# Altium PCB PCB1.pcbdoc
Units mil, origin at the board's own origin, x right, y up, seen from the top; angles counter-clockwise.
Board outline 3247.81 x 2766.73 mil, 2 copper layers (Top Layer, Bottom Layer), stack 2.756 mil thick; 92 components, 72 nets, 327 pads, 99 vias.
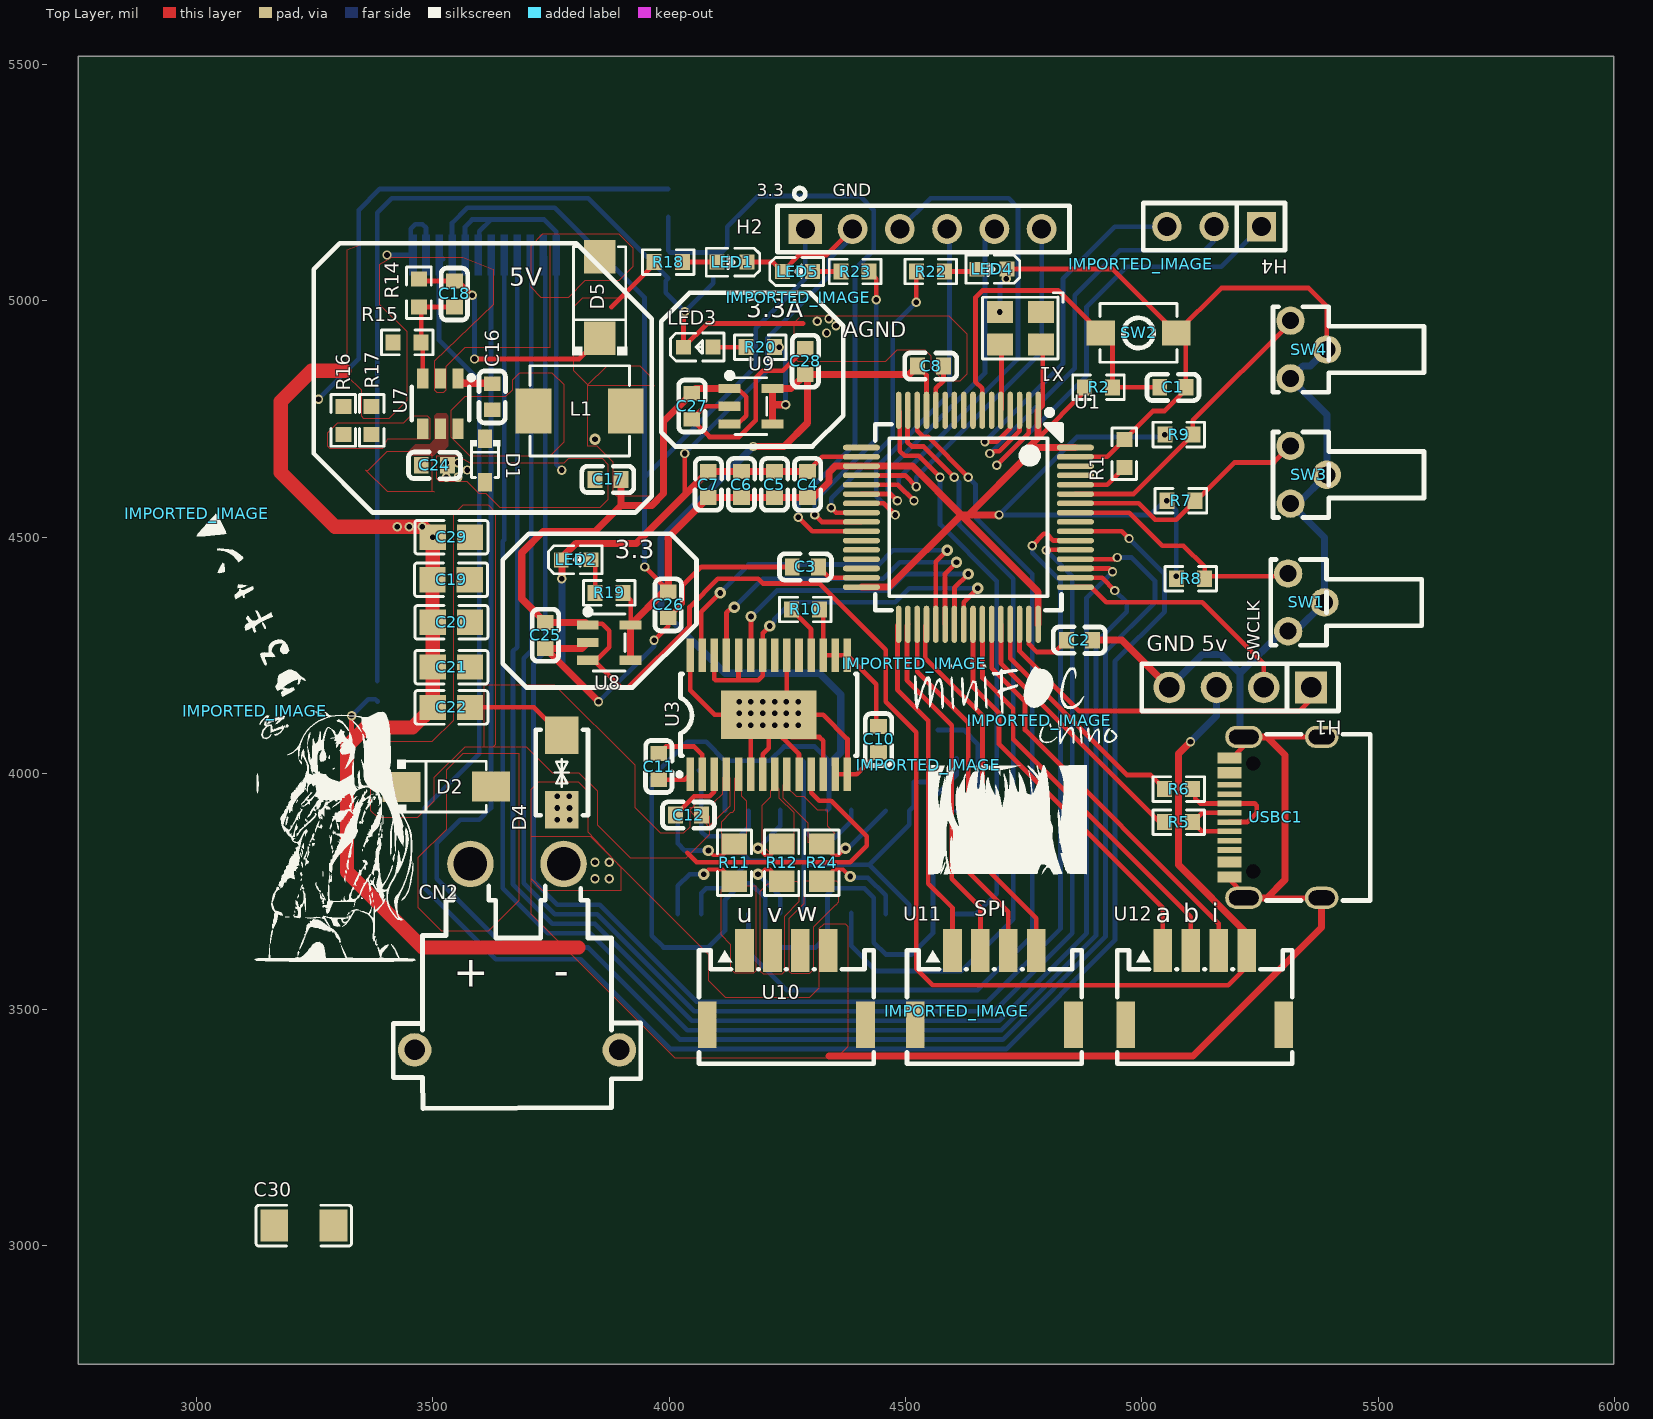
[diagram p0: Top Layer view]
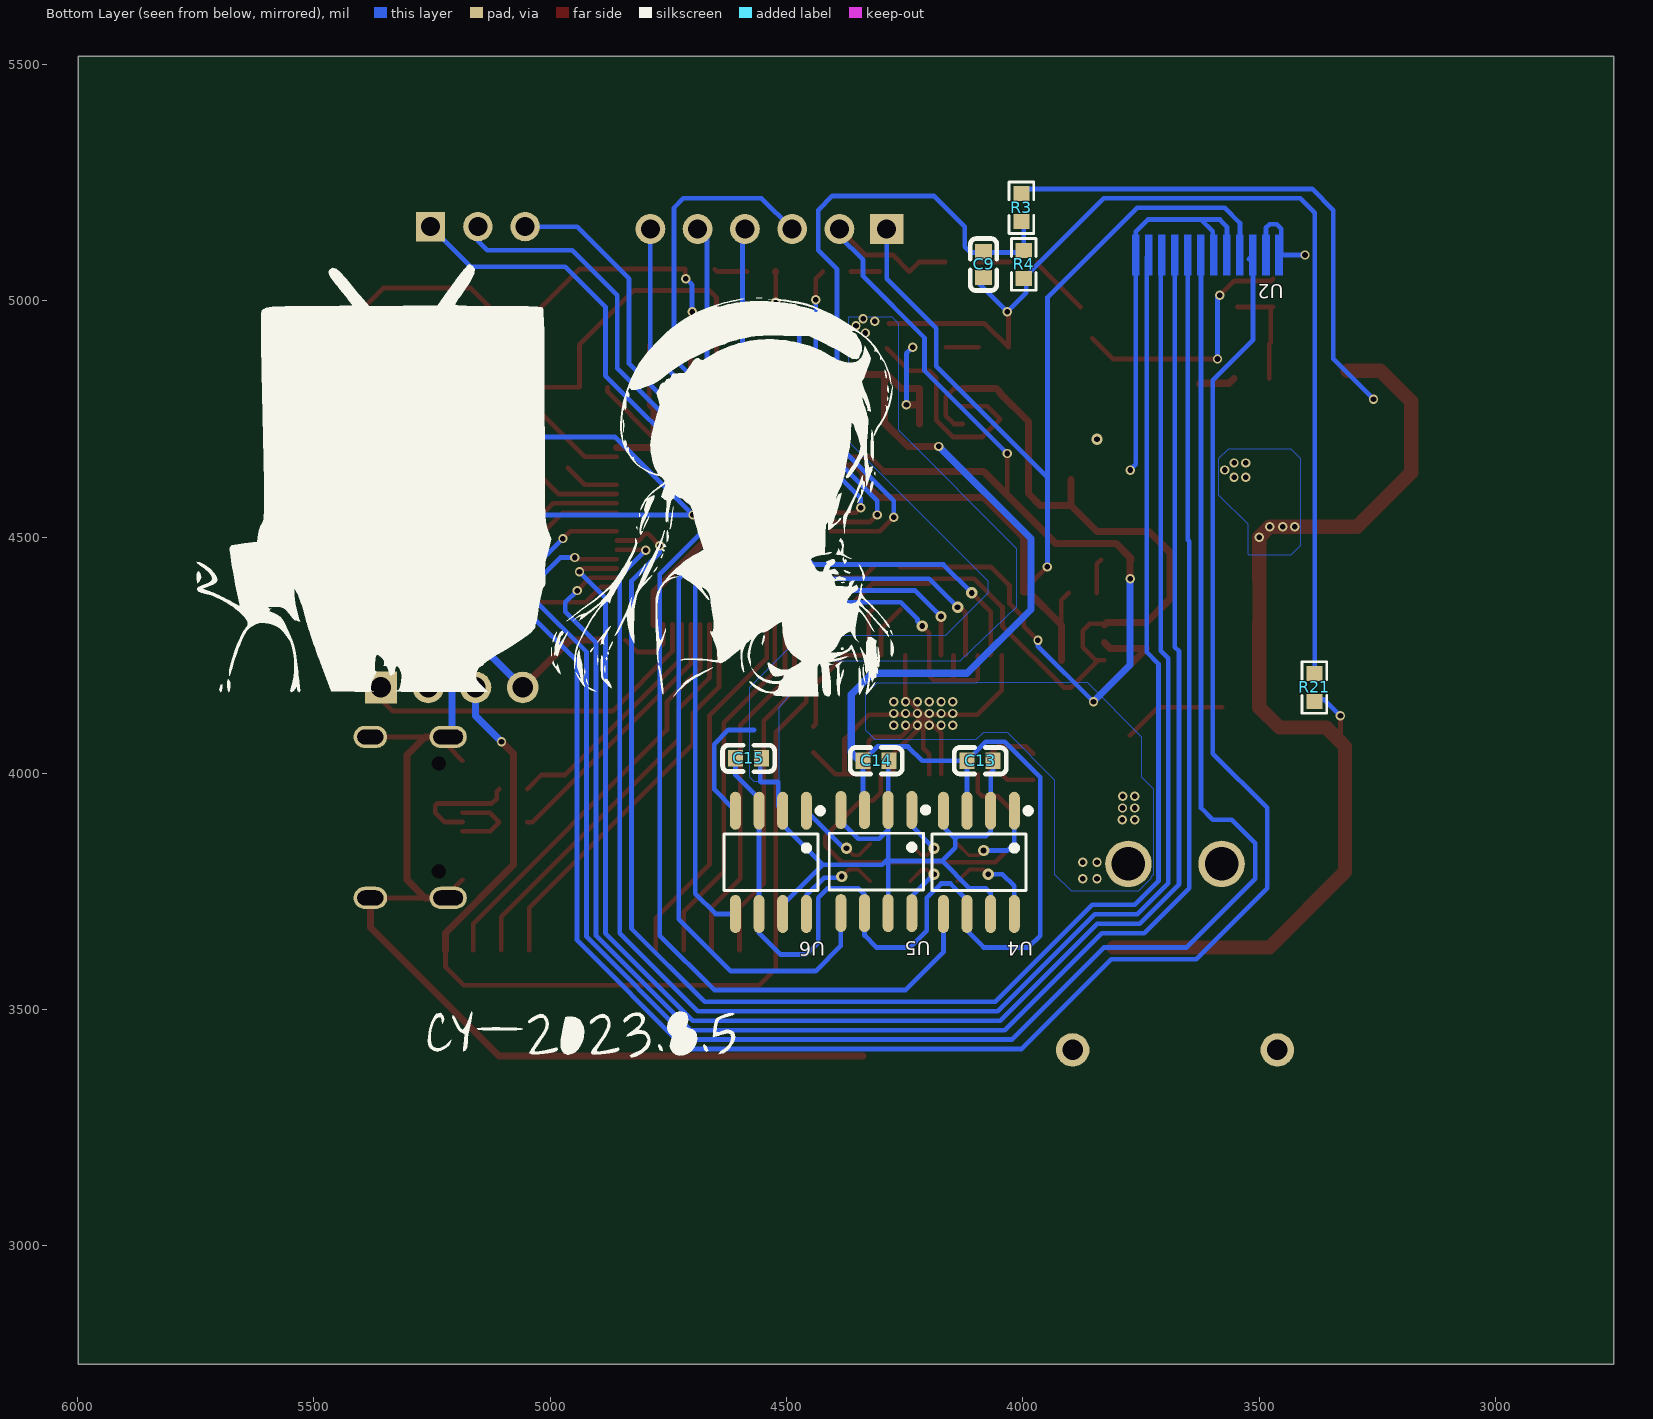
[diagram p1: Bottom Layer view, seen from below]

## Layer stack, top to bottom
Top Layer: signal copper 1.378
Bottom Layer: signal copper 1.378

## Board outline
5997.81,2750 2750,2750 2750,5516.73 5997.81,5516.73

## Components (designator, comment, footprint, x,y, rotation, side; value= is the part's Value field where it differs from the comment)
C1 "CAP_0603" C0603 5065.37,4816.73 r180 top
C2 "CAP_0603" C0603 4867.81,4281.73 r0 top
C3 "CAP_0603" C0603 4287.81,4436.73 r180 top
C4 "CAP_0603" C0603 4292.6,4611.12 r270 top
C5 "CAP_0603" C0603 4222.6,4611.12 r270 top
C6 "CAP_0603" C0603 4152.6,4611.12 r270 top
C7 "CAP_0603" C0603 4082.6,4611.12 r270 top
C8 "CAP_0603" C0603 4552.81,4861.73 r180 top
C9 "CAP_0603" C0603 4082.81,5076.73 r90 bottom
C10 "CAP_0603" C0603 4442.81,4071.73 r90 top
C11 "CAP_0603" C0603 3977.81,4014.17 r270 top
C12 "CAP_0603" C0603 4040.37,3911.73 r180 top
C13 "CAP_0603" C0603 4090.25,4026.73 r0 bottom
C14 "CAP_0603" C0603 4310.25,4026.73 r0 bottom
C15 "CAP_0603" C0603 4580.25,4031.73 r0 bottom
C16 "CAP_0603" C0603 3625.37,4796.73 r90 top
C17 "CAP_0603" C0603 3870.37,4621.73 r0 top
C18 "CAP_0603" C0603 3545.37,5014.29 r90 top
C19 "CAP_0805" C0805 3538.43,4409.62 r0 top
C20 "CAP_0805" C0805 3539.06,4319.62 r0 top
C21 "CAP_0805" C0805 3539.06,4224.62 r0 top
C22 "CAP_0805" C0805 3539.06,4139.62 r0 top
C24 "CAP_0603" C0603 3502.81,4651.73 r180 top
C25 "CAP_0603" C0603 3737.81,4291.73 r270 top
C26 "CAP_0603" C0603 3997.81,4356.73 r90 top
C27 "CAP_0603" C0603 4047.81,4776.73 r270 top
C28 "CAP_0603" C0603 4287.81,4871.73 r270 top
C29 "CAP_0805" C0805 3539.06,4499.62 r0 top
C30 "CAP_1206" C1206 3226.74,3043.02 r0 top
CN2 "XT30PW-M" CONN-TH_XT30PW-M 3677.81,3611.73 r0 top
D1 "1N5819WS_C191023" SOD-323_L1.8-W1.3-LS2.5-RD 3610.37,4661.73 r270 top
D2 "SS54_C727065" SMA_L4.3-W2.6-LS5.0-RD 3527.81,3971.73 r0 top
D4 "SMAJ15CA_C726784" SMA_L4.3-W2.5-LS5.0-BI 3772.81,4001.73 r90 top
D5 "SMAJ5.0A_C113952" SMA_L4.4-W2.6-LS5.0-RD 3852.81,5006.73 r90 top
H1 "HDR-F_2.54_1x4P" HDR-TH_4P-P2.54-V-F 5207.81,4181.73 r180 top
H2 "HDR-F_2.54_1x6P" HDR-TH_6P-P2.54-V-F 4537.81,5151.73 r0 top
H4 "HDR-F_2.54_1x3P" HDR-TH_3P-P2.54-V-F 5152.81,5156.73 r180 top
IMPORTED_IMAGE "IMPORTED_IMAGE" IMPORTED_IMAGE 4517.8,4231.73 r0 top
IMPORTED_IMAGE "IMPORTED_IMAGE" IMPORTED_IMAGE 4782.81,4111.73 r0 top
IMPORTED_IMAGE "IMPORTED_IMAGE" IMPORTED_IMAGE 3000,4549.23 r0 top
IMPORTED_IMAGE "IMPORTED_IMAGE" IMPORTED_IMAGE 4547.81,4016.99 r0 top
IMPORTED_IMAGE "IMPORTED_IMAGE" IMPORTED_IMAGE 3122.81,4131.73 r0 top
IMPORTED_IMAGE "IMPORTED_IMAGE" IMPORTED_IMAGE 4272.81,5006.73 r0 top
IMPORTED_IMAGE "IMPORTED_IMAGE" IMPORTED_IMAGE 4997.81,5076.73 r0 top
IMPORTED_IMAGE "IMPORTED_IMAGE" IMPORTED_IMAGE 4608.3,3496.73 r0 top
L1 "GPSR0520-4R7M" IND-SMD_L5.2-W4.7_GPSR0520 3810.37,4766.73 r180 top
LED1 "LTST-C191KRKT" LED0603-RD 4132.81,5081.73 r180 top
LED2 "LTST-C191KRKT" LED0603-RD 3802.81,4451.73 r0 top
LED3 "LTST-C191KRKT" LED0603-RD 4061.34,4901.6 r0 top
LED4 "19-217/GHC-YR1S2/3T" LED0603-RD 4682.81,5066.73 r180 top
LED5 "19-217/GHC-YR1S2/3T" LED0603-RD 4271.34,5061.6 r0 top
R1 "Res_0603" R0603 4962.81,4676.39 r90 top
R2 "Res_0603" R0603 4908.15,4816.73 r180 top
R3 "Res_0603" R0603 4002.81,5196.73 r90 bottom
R4 "Res_0603" R0603 3997.81,5076.73 r90 bottom
R5 "Res_0603" R0603 5077.81,3896.73 r180 top
R6 "Res_0603" R0603 5077.81,3966.73 r180 top
R7 "Res_0603" R0603 5082.47,4576.73 r180 top
R8 "Res_0603" R0603 5103.15,4411.73 r180 top
R9 "Res_0603" R0603 5078.15,4716.73 r180 top
R10 "Res_0603" R0603 4287.81,4346.73 r0 top
R11 "Res_0805" R0805 4137.81,3811.1 r270 top
R12 "Res_0805" R0805 4237.81,3811.1 r270 top
R14 "Res_0603" R0603 3470.37,5016.73 r90 top
R15 "Res_0603" R0603 3445.37,4911.73 r0 top
R16 "Res_0603" R0603 3310.37,4746.73 r90 top
R17 "Res_0603" R0603 3370.37,4746.73 r90 top
R18 "Res_0603" R0603 3997.81,5081.73 r180 top
R19 "Res_0603" R0603 3872.81,4381.73 r0 top
R20 "Res_0603" R0603 4192.47,4901.73 r0 top
R21 "Res_0603" R0603 3382.81,4181.73 r270 bottom
R22 "Res_0603" R0603 4553.15,5061.73 r0 top
R23 "Res_0603" R0603 4393.15,5061.73 r180 top
R24 "Res_0805" R0805 4322.81,3811.1 r270 top
SW1 "TC-1150DL-8.0H-250" SW-SMD_DEALON_TC-1150DL-8.0H-160 5347.81,4361.73 r90 top
SW2 "KEY-3*4*2" SW-SMD_L4.0-W2.9-LS5.0 4992.81,4931.73 r180 top
SW3 "TC-1150DL-8.0H-250" SW-SMD_DEALON_TC-1150DL-8.0H-160 5352.81,4631.73 r90 top
SW4 "TC-1150DL-8.0H-250" SW-SMD_DEALON_TC-1150DL-8.0H-160 5352.81,4896.73 r90 top
U1 "STM32F405RGT6" LQFP-64_L10.0-W10.0-P0.50-LS12.0-BL 4632.81,4541.73 r180 top
U2 "IPS-12P" IPS 3607.81,5096.73 r0 bottom
U3 "DRV8313PWP" TSSOP-28_L9.7-W4.4-P0.65-LS6.4-TL-EP-2 4210.57,4123.81 r90 top
U4 "INA240A1D" SOIC-8_L4.9-W3.9-P1.27-LS6.0-BL 4092.81,3811.73 r0 bottom
U5 "INA240A1D" SOIC-8_L4.9-W3.9-P1.27-LS6.0-BL 4309.73,3813.44 r0 bottom
U6 "INA240A1D" SOIC-8_L4.9-W3.9-P1.27-LS6.0-BL 4532.81,3811.73 r0 bottom
U7 "MP2451DT-LF-Z" SOT-23-6_L2.9-W1.6-P0.95-LS2.8-BR 3515.88,4782.24 r90 top
U8 "RT9013-33GB" SOT-23-5_L3.0-W1.7-P0.95-LS2.8-BL 3872.81,4276.73 r270 top
U9 "RT9013-33GB" SOT-23-5_L3.0-W1.7-P0.95-LS2.8-BL 4172.81,4776.73 r270 top
U10 "WAFER-ZH1.5-4PWB" CONN-SMD_4P-P1.50_XUNPU_WAFER-ZH1.5-4PWB 4247.81,3546.73 r0 top
U11 "WAFER-ZH1.5-4PWB" CONN-SMD_4P-P1.50_XUNPU_WAFER-ZH1.5-4PWB 4687.81,3546.73 r0 top
U12 "WAFER-ZH1.5-4PWB" CONN-SMD_4P-P1.50_XUNPU_WAFER-ZH1.5-4PWB 5132.81,3546.73 r0 top
USBC1 "TYPE-C-31-M-12" USB-C_SMD-TYPE-C-31-M-12 5282.81,3906.73 r90 top
X1 "OT32258MJBA4SL" OSC-SMD_4P-L3.2-W2.5-BL 4742.81,4941.73 r180 top

## Footprints (in the part's own frame and the unit in brackets; to place one, negate y for a bottom-side part, rotate by r counter-clockwise, add the part's x,y. Pads: shape width x height; smd on the part's side, far side on the other; paste and mask are expansions set on the pad)
C0603 [mm]
  rect 0.8x0.9 smd: 1(-0.7,0) 2(0.7,0)
  silkscreen extent -1.41,-0.71 1.39,0.72
C0805 [mm]
  rect 1.41x1.35 smd: 1(-1,0) 2(1,0)
  silkscreen extent -1.96,-0.9 1.96,0.9
C1206 [mm]
  rect 1.485x1.728 smd: 1(-1.593,0) 2(1.593,0)
  silkscreen extent -2.56,-1.09 2.56,1.09
CONN-SMD_4P-P1.50_XUNPU_WAFER-ZH1.5-4PWB [mm]
  rect 1x2.3 smd: 1(-2.25,2) 2(-0.75,2) 3(0.75,2) 4(2.25,2)
  rect 1x2.5 smd: 5(4.25,-2) 6(-4.25,-2)
  silkscreen extent -4.7,-4.1 4.7,2
CONN-TH_XT30PW-M [mm]
  round 2.5 hole 1.8: 1(-2.5,5) 2(2.5,5)
  round 1.8 hole 1.1: 3(5.5,-5) 4(-5.5,-5)
  silkscreen extent -6.65,-8.15 6.65,3.81
HDR-TH_3P-P2.54-V-F [mil]
  rect 62x62 hole 40.16: 1(-100,0)
  round 62 hole 40.16: 2(0,0) 3(100,0)
  silkscreen extent -150,-50 150,50
HDR-TH_4P-P2.54-V-F [mm]
  rect 1.7x1.7 hole 1.1: 1(-3.81,0)
  round 1.7 hole 1.1: 2(-1.27,0) 3(1.27,0) 4(3.81,0)
  silkscreen extent -5.29,-1.27 5.29,1.27
HDR-TH_6P-P2.54-V-F [mm]
  rect 1.8x1.6 hole 1.02: 1(-6.35,0)
  round 1.6 hole 1.02: 2(-3.81,0) 3(-1.27,0) 4(1.27,0) 5(3.81,0) 6(6.35,0)
  silkscreen extent -7.85,-1.25 7.85,2.2
IMPORTED_IMAGE [mil]
  silkscreen extent 0,-110 360,0
IND-SMD_L5.2-W4.7_GPSR0520 [mm]
  rect 1.924x2.42 smd: 1(2.478,0) 2(-2.478,0)
  silkscreen extent -2.68,-2.43 2.68,2.43
IPS [mil]
  Top Layer region: 160.65,-42.5 145.65,-42.5 145.65,42.5 160.65,42.5
  Top Layer region: 133.09,-42.5 118.09,-42.5 118.09,42.5 133.09,42.5
  Top Layer region: 105.53,-42.5 90.53,-42.5 90.53,42.5 105.53,42.5
  Top Layer region: 77.97,-42.5 62.97,-42.5 62.97,42.5 77.97,42.5
  Top Layer region: 22.85,-42.5 7.85,-42.5 7.85,42.5 22.85,42.5
  Top Layer region: 50.41,-42.5 35.41,-42.5 35.41,42.5 50.41,42.5
  Top Layer region: -32.26,-42.5 -47.26,-42.5 -47.26,42.5 -32.26,42.5
  Top Layer region: -4.7,-42.5 -19.7,-42.5 -19.7,42.5 -4.7,42.5
  Top Layer region: -87.38,-42.5 -102.38,-42.5 -102.38,42.5 -87.38,42.5
  Top Layer region: -59.82,-42.5 -74.82,-42.5 -74.82,42.5 -59.82,42.5
  Top Layer region: -142.5,-42.5 -157.5,-42.5 -157.5,42.5 -142.5,42.5
  Top Layer region: -114.94,-42.5 -129.94,-42.5 -129.94,42.5 -114.94,42.5
LED0603-RD [mm]
  rect 0.8x0.8 smd: 1(-0.799,-0.003) 2(0.799,0.003)
  silkscreen extent -1.49,-0.75 1.39,0.76
LQFP-64_L10.0-W10.0-P0.50-LS12.0-BL [mm]
  oval 0.3x2 smd: 1(-3.75,-5.75) 2(-3.25,-5.75) 3(-2.75,-5.75) 4(-2.25,-5.75) 5(-1.75,-5.75) 6(-1.25,-5.75) 7(-0.75,-5.75) 8(-0.25,-5.75) 9(0.25,-5.75) 10(0.75,-5.75) 11(1.25,-5.75) 12(1.75,-5.75) 13(2.25,-5.75) 14(2.75,-5.75) 15(3.25,-5.75) 16(3.75,-5.75) 33(3.75,5.75) 34(3.25,5.75) 35(2.75,5.75) 36(2.25,5.75) 37(1.75,5.75) 38(1.25,5.75) 39(0.75,5.75) 40(0.25,5.75) 41(-0.25,5.75) 42(-0.75,5.75) 43(-1.25,5.75) 44(-1.75,5.75) 45(-2.25,5.75) 46(-2.75,5.75) 47(-3.25,5.75) 48(-3.75,5.75)
  oval 2x0.3 smd: 17(5.75,-3.75) 18(5.75,-3.25) 19(5.75,-2.75) 20(5.75,-2.25) 21(5.75,-1.75) 22(5.75,-1.25) 23(5.75,-0.75) 24(5.75,-0.25) 25(5.75,0.25) 26(5.75,0.75) 27(5.75,1.25) 28(5.75,1.75) 29(5.75,2.25) 30(5.75,2.75) 31(5.75,3.25) 32(5.75,3.75) 49(-5.75,3.75) 50(-5.75,3.25) 51(-5.75,2.75) 52(-5.75,2.25) 53(-5.75,1.75) 54(-5.75,1.25) 55(-5.75,0.75) 56(-5.75,0.25) 57(-5.75,-0.25) 58(-5.75,-0.75) 59(-5.75,-1.25) 60(-5.75,-1.75) 61(-5.75,-2.25) 62(-5.75,-2.75) 63(-5.75,-3.25) 64(-5.75,-3.75)
  silkscreen extent -5,-5.79 5,5
OSC-SMD_4P-L3.2-W2.5-BL [mm]
  rect 1.4x1.2 smd: 1(-1.1,-0.875) 2(1.1,-0.875) 3(1.1,0.875) 4(-1.1,0.875)
  silkscreen extent -2.29,-1.9 2.03,1.65
R0603 [mil]
  rect 31.75x34.02 smd: 1(-29.66,0) 2(29.66,0)
  silkscreen extent -55,-26 55,26
R0805 [mm]
  rect 1.133x1.377 smd: 1(-1,0) 2(1,0)
  silkscreen extent -1.76,-0.92 1.76,0.92
SMA_L4.3-W2.5-LS5.0-BI [mm]
  rect 2x1.8 smd: 1(-2,0) 2(2,0)
  silkscreen extent -2.3,-1.4 2.3,1.4
SMA_L4.3-W2.6-LS5.0-RD [mm]
  rect 2.046x1.62 smd: 1(-2.404,-0.009) 2(2.404,0.009)
  silkscreen extent -2.61,-1.44 2.16,1.44
SMA_L4.4-W2.6-LS5.0-RD [mm]
  rect 1.8x1.7 smd: 1(-2.192,0) 2(2.192,0)
  silkscreen extent -3.11,-1.48 2.73,1.48
SOD-323_L1.8-W1.3-LS2.5-RD [mm]
  rect 1x0.75 smd: 1(-1.173,0) 2(1.173,0)
  silkscreen extent -1.08,-0.8 0.9,0.8
SOIC-8_L4.9-W3.9-P1.27-LS6.0-BL [mm]
  oval 0.588x2.045 smd: 1(-1.905,-2.772) 2(-0.635,-2.772) 3(0.635,-2.772) 4(1.905,-2.772) 5(1.905,2.772) 6(0.635,2.772) 7(-0.635,2.772) 8(-1.905,2.772)
  silkscreen extent -2.8,-2.92 2.53,1.52
SOT-23-5_L3.0-W1.7-P0.95-LS2.8-BL [mm]
  rect 0.49x1.157 smd: 1(-0.95,-1.154) 2(0,-1.154) 3(0.95,-1.154)
  rect 0.49x1.175 smd: 4(0.95,1.154) 5(-0.95,1.154)
  silkscreen extent -1.8,-1.29 1.53,0.85
SOT-23-6_L2.9-W1.6-P0.95-LS2.8-BR [mm]
  rect 1.1x0.6 smd: 1(1.35,-0.95) 2(1.35,0) 3(1.35,0.95) 4(-1.35,0.95) 5(-1.35,0) 6(-1.35,-0.95)
  silkscreen extent -0.9,-1.78 1.52,1.55
SW-SMD_DEALON_TC-1150DL-8.0H-160 [mil]
  round 60 hole 36: 1(-61.03,38.39) 2(61.02,38.38) 3(-0.01,-38.38)
  silkscreen extent -91,-244 91,75
SW-SMD_L4.0-W2.9-LS5.0 [mm]
  rect 1.53x1.36 smd: 1(-2.035,0) 2(2.035,0)
  silkscreen extent -2.08,-1.58 2.08,1.58
TSSOP-28_L9.7-W4.4-P0.65-LS6.4-TL-EP-2 [mil]
  rect 71x16 smd: 1(-125.98,166.33) 2(-125.98,140.74) 3(-125.98,115.15) 4(-125.98,89.56) 5(-125.98,63.97) 6(-125.98,38.38) 7(-125.98,12.79) 8(-125.98,-12.8) 9(-125.98,-38.39) 10(-125.98,-63.98) 11(-125.98,-89.57) 12(-125.98,-115.16) 13(-125.98,-140.75) 14(-125.98,-166.34) 15(125.99,-166.21) 16(125.99,-140.62) 17(125.99,-115.03) 18(125.99,-89.44) 19(125.99,-63.85) 20(125.99,-38.26) 21(125.99,-12.66) 22(125.99,12.79) 23(125.99,38.38) 24(125.99,63.97) 25(125.99,89.56) 26(125.99,115.15) 27(125.99,140.74) 28(125.99,166.33)
  rect 103.15x201.57 smd: 29(0.01,-0.16)
  silkscreen extent -130,-187 87,193
USB-C_SMD-TYPE-C-31-M-12 [mm]
  oval 1.2x2 hole 0.8 slot 1.6 at 90 deg: 0(-4.325,1.706) 1(4.325,1.706)
  oval 1.2x1.8 hole 0.8 slot 1.4 at 90 deg: 2(4.325,-2.474) 3(-4.325,-2.474)
  rect 0.3x1.3 smd: A1(-3.35,2.474) A4(-2.55,2.474) A5(-1.25,2.474) A6(-0.25,2.474) A7(0.25,2.474) A8(1.25,2.474) A9(2.55,2.474) A12(3.35,2.474) B1(3.05,2.474) B4(2.25,2.474) B5(1.75,2.474) B6(0.75,2.474) B7(-0.75,2.474) B8(-1.75,2.474) B9(-2.25,2.474) B12(-3.05,2.474)
  Multi-Layer board cut-out: -2.9,0.831 -2.737,0.868 -2.607,0.972 -2.534,1.122 -2.534,1.289 -2.607,1.439 -2.737,1.544 -2.9,1.581 -2.9,1.581 -3.063,1.544 -3.193,1.439 -3.266,1.289 -3.266,1.122 -3.193,0.972 -3.063,0.868 -2.9,0.831
  Multi-Layer board cut-out: 2.9,0.831 3.063,0.868 3.193,0.972 3.266,1.122 3.266,1.289 3.193,1.439 3.063,1.544 2.9,1.581 2.9,1.581 2.737,1.544 2.607,1.439 2.534,1.289 2.534,1.122 2.607,0.972 2.737,0.868 2.9,0.831
  silkscreen extent -4.47,-5.09 4.47,0.49

## Via types
v1: diameter 19.68, hole 11.81, Top Layer to Bottom Layer, 74 vias
v2: diameter 24.02, hole 12.01, Top Layer to Bottom Layer, 15 vias
v3: diameter 20, hole 12, Top Layer to Bottom Layer, 10 vias

## Nets (pads, with @x,y where several pads share a name; then routed paths per layer and width w, separated by ;. In a path a pad name is that pad's centre, name@x,y a point inside that pad or via, vN(x,y) a via of type N, cw(c..) or ccw(c..) an arc to the next point about the centre after c; other vN are vias at no path point)
3V3: C4.2 C5.2 C6.2 C7.2 C26.2 H2.1 R2.2 R7.2 R8.2 R9.2 R19.2 U1.1 U1.19 U1.32 U1.48 U1.64 U8.4 U8.5 X1.4 | length 5256.9
  Top Layer w10: R19.2@3902.81,4381.73 3918.23,4366.31 U8.5 ; v1(3947.81,4436.73) C26.2@3997.81,4386.73 ; 4780.45,4709.37 4878.49,4807.41 R2.2 ; U1.1 4790.45,4778.1 X1.4@4790.45,4906.61
  Top Layer w15: U8.4 U8.5 3988.39,4384.29 C26.2 3997.81,4386.73 3997.81,4498.77 C7.2 C6.2 C5.2 C4.2 4304.64,4583.56 4337.81,4616.73 4337.81,4636.73 4351.08,4650 U1.19 4514.54,4650 4617.81,4546.73 ; U1.32 4465.17,4394.09 4617.81,4546.73 ; v1(4697.81,4546.73) 4632.81,4546.73 ; U1.48 4780.45,4384.09 4617.81,4546.73 ; U1.1 4780.45,4709.37 4760.45,4689.37 ; U1.64 4760.45,4689.37 ; 4617.81,4546.73 4632.81,4546.73 ; 4632.81,4546.73 4760.45,4674.37 4760.45,4689.37
  Bottom Layer w10: 3540.49,5096.73 3540.49,5164.41 3572.81,5196.73 3757.81,5196.73 3947.81,5006.73 3947.81,4626.73 ; v1(3947.81,4436.73) 3947.81,4626.73 ; H2.1 4287.81,5046.73 4182.81,4941.73 4182.81,4861.73 3947.81,4626.73 ; v1@5047.81,4576.73 5017.81,4546.73 v1(4697.81,4546.73) 4862.81,4711.73 v1@5047.81,4711.73 ; v1(5052.81,4576.73) 5072.81,4556.73 v1(5072.81,4416.73)
  other v1: 5048.49,4716.73
3V3A: C8.2 C13.2 C14.2 C15.2 C28.2 R20.2 U1.13 U4.3 U4.6 U5.3 U5.6 U6.3 U6.6 U9.4 U9.5 | length 4354.4
  Top Layer w10: C8.2 4544.23,4842.75 U1.13
  Top Layer w15: v1(4177.81,4691.73) 4242.81,4691.73 4292.81,4741.73 4292.81,4839.17 C28.2 ; U9.4 4218.23,4779.91 ; v3@4247.81,4781.73 v3(4245.99,4779.91) 4218.23,4779.91 ; C8.2 4507.69,4844.17 C28.2 ; 4218.23,4779.91 U9.5 4257.77,4814.13 C28.2
  Bottom Layer w10: U4.3 C13.2 ; v3(4232.81,4901.73) 4245.99,4888.55 v3(4245.99,4779.91) ; U5.3 4337.81,3925.67 4337.81,4019.39 C14.2 4307.81,4056.73 4242.81,4056.73 4212.81,4026.73 C13.2 ; C15.2 4607.81,3996.73 4557.81,3946.73 U6.3 U6.6 4557.81,3661.73 4512.81,3616.73 4457.81,3616.73 4432.81,3641.73 4432.81,3736.73 4412.81,3756.73 4347.81,3756.73 4334.73,3743.65 U5.6 4334.73,3657.03 4309.43,3631.73 4237.81,3631.73 4202.81,3666.73 4202.81,3736.73 4172.81,3766.73 4152.81,3766.73 4117.81,3731.73 U4.6 4117.81,3666.73 4082.81,3631.73 3987.81,3631.73 3962.81,3656.73 3962.81,3991.73 4037.81,4066.73 4077.81,4066.73 C13.2
  Bottom Layer w15: v1(4177.81,4691.73) 3982.81,4496.73 3982.81,4346.73 4117.81,4211.73 4317.81,4211.73 4362.81,4166.73 4362.81,4044.39 C14.2@4337.81,4019.39
$1N3156: R1.1 U1.60 | length 118.6
  Top Layer w10: U1.60 4926.71,4610.63 R1.1
$1N3158: U1.5 X1.3 | length 141
  Top Layer w10: X1.3 4702.81,4903.97 4702.81,4769.2 U1.5
$1N3164: C3.1 U1.31 | length 100.6
  Top Layer w10: C3.1 4338.32,4413.78 U1.31
$1N3165: C2.1 U1.47 | length 138.5
  Top Layer w10: U1.47 4760.76,4273.78 4777.81,4256.73 4815.25,4256.73 C2.1
$1N3189: R6.1 USBC1.A6 USBC1.B6 | length 239.1
  Top Layer w10: R6.1 5112.81,3961.39 5112.81,3946.73 5123.28,3936.26 USBC1.B6 5238.28,3936.26 5242.81,3931.73 5242.81,3916.73 5222.97,3896.89 USBC1.A6
$1N3190: R5.1 USBC1.A7 USBC1.B7 | length 172.2
  Top Layer w10: USBC1.B7 5127,3877.2 R5.1 5127.31,3916.57 USBC1.A7
$1N3207: R10.1 U3.18 | length 114.3
  Top Layer w10: R10.1 4300,4304.88 U3.18
$1N3215: C11.2 U3.1 | length 71.1
  Top Layer w10: C11.2 4033.02,3986.61 U3.1
$1N3216: C11.1 U3.2 | length 147.2
  Top Layer w10: C11.1 3992.81,4056.73 4052.81,4056.73 4069.82,4039.72 U3.2
$1N3217: C12.2 U3.3 | length 139.6
  Top Layer w10: C12.2 4052.4,3951.32 4085.41,3951.32 4095.41,3961.32 U3.3
$1N12380: C16.1 D1.1 L1.1 U7.6
$1N12381: C16.2 U7.1 | length 76.7
  Top Layer w15: U7.1 3563.28,4825.39 3624.27,4825.39 C16.2
$1N16516: C18.1 R14.1 R15.2 U7.3 | length 229.7
  Top Layer w10: R14.1 R14.1@3470.71,4986.73 ; U7.3 3478.48,4908.28 R15.2 3475.03,4982.41 R14.1@3470.71,4986.73 ; C18.1 R14.1@3470.71,4986.73
$1N21931: R16.1 R17.1 U7.4
$1N27543: LED1.2 R18.1 | length 73.9
  Top Layer w10: R18.1 4101.2,5081.73 LED1.2
$1N28448: LED2.2 R19.1 | length 73.8
  Top Layer w10: LED2.2 3843.15,4443 R19.1
$1N29031: LED3.2 R20.1 | length 70
  Top Layer w10: LED3.2 R20.1
$1N33605: LED4.2 R22.2 | length 70.5
  Top Layer w10: R22.2 4646.47,5061.73 LED4.2
$1N33894: LED5.2 R23.2 | length 60.7
  Top Layer w10: LED5.2 R23.2
+5V: C17.2 C18.2 C25.1 C27.1 D5.1 H1.3 L1.2 R14.2 R18.2 U8.1 U8.3 U9.1 U9.3 U12.4 | length 4875.4
  Top Layer w10: R14.2 3474.91,5041.85 C18.2 3552.69,5041.85 v1(3582.81,5011.73) ; v1(3587.81,4876.73) 3809.13,4876.73 D5.1 ; U8.3 U8.3@3840.21,4239.33 ; U8.1 3829.99,4316.73 3857.81,4316.73 3872.81,4301.73 3872.81,4266.73 3845.41,4239.33 U8.3@3840.21,4239.33 ; 3877.81,4986.73 3968.15,5077.07 R18.2 ; U9.3 4145.41,4739.33 4162.81,4756.73 4162.81,4796.73 4145.41,4814.13 U9.1 ; U12.4 5221.4,3590.32 5182.81,3551.73 4557.81,3551.73 4522.81,3586.73 4522.81,4086.73 4457.81,4151.73 4457.81,4261.73 4317.81,4401.73 4197.81,4401.73 4187.81,4411.73 4102.81,4411.73 4042.81,4351.73 4042.81,4311.73 3912.81,4181.73 3897.81,4181.73 U8.3@3840.21,4239.33
  Top Layer w15: U8.1 3822.23,4319.29 C25.1 3687.81,4369.29 3687.81,4466.73 3732.81,4511.73 3842.81,4511.73 3897.93,4566.85 ; C17.2 3897.93,4566.85 ; U9.1 4055.21,4814.13 4047.81,4806.73 C27.1 3987.81,4744.29 3987.81,4591.73 3962.93,4566.85 3897.93,4566.85 ; v1(5102.81,4066.73) 5077.81,4041.73 5077.81,3806.05 5221.4,3662.46 U12.4
  Bottom Layer w10: v1(3582.81,5011.73) 3587.81,5006.73 v1(3587.81,4876.73)
  Bottom Layer w15: v1(5102.81,4066.73) 5157.81,4121.73 H1.3
  other v2: 3842.81,4706.73
AGND: C8.1 C9.1 C13.1 C14.1 C15.1 C27.2 C28.1 LED3.1 R4.1 R21.1 U1.12 U4.2 U4.4 U4.7 U5.2 U5.4 U5.7 U6.2 U6.4 U6.7 U9.2 | length 4727.9
  Top Layer w10: v1(4032.81,4976.73) 4029.86,4973.78 LED3.1 4080.13,4951.73 4282.81,4951.73 ; U9.2 4075.37,4776.73 C27.2 4085.25,4711.73 4147.81,4711.73 4182.81,4746.73 4182.81,4836.73 4197.81,4851.73 4240.25,4851.73 C28.1 ; U1.12 4563.91,4814.47 4580.37,4830.93 C8.1
  Bottom Layer w10: R21.1@3381.97,4195.55 3381.97,5185.89 3412.81,5216.73 3828.15,5216.73 R4.1 3992.81,5042.07 3992.81,5016.73 v1(4032.81,4976.73) 4092.81,5036.73 C9.1@4092.81,5046.73 ; 4062.69,4006.73 4067.81,4001.61 U4.2 4067.81,3876.73 4077.81,3866.73 4137.81,3866.73 4142.81,3861.73 ; U4.7 4067.81,3746.73 4077.81,3756.73 4112.81,3756.73 4170.73,3814.65 ; U4.4 4167.81,3886.73 4142.81,3861.73 ; C14.1 4284.73,4024.7 U5.2 4284.73,3881.03 ; U5.7 4284.73,3814.65 ; U5.4 4384.73,3898.65 4347.81,3861.73 4304.03,3861.73 4284.73,3881.03 ; U6.7 4507.81,3721.73 4422.81,3806.73 ; 4555.42,4012.18 4555.42,3982.73 4554.43,3981.73 4517.14,3981.73 4517.14,3930.21 U6.2 4507.81,3891.73 4422.81,3806.73 ; 4567.81,4091.73 4622.81,4091.73 4652.81,4061.73 4652.81,3965.88 U6.4 ; 4142.81,3861.73 4142.81,3842.56 4170.73,3814.65 ; 4170.73,3814.65 4284.73,3814.65 ; 4284.73,3814.65 4289.06,3814.65 ; 4284.73,3814.65 4284.73,3818.98 ; 4284.73,3818.98 4284.73,3881.03 ; 4284.73,3818.98 4289.06,3814.65 ; 4289.06,3814.65 4296.98,3806.73 4422.81,3806.73
  other v1: 4332.81,4931.73 4352.81,4946.73 4312.81,4956.73 4337.81,4961.73
DC: U1.52 | length 4029.2
  Top Layer w10: U1.52 4944.23,4453.15 v1(4947.81,4456.73)
  Bottom Layer w10: 3623.17,5096.73 3622.81,5096.38 3622.81,3926.73 3597.81,3901.73 3557.81,3901.73 3507.81,3851.73 3507.81,3776.73 3652.81,3631.73 3827.81,3631.73 4022.81,3436.73 4705.44,3436.73 4922.81,3654.1 4922.81,4256.73 5027.81,4361.73 5027.81,4406.73 4977.81,4456.73 v1@4942.6,4456.73
DM: R5.2 U1.44 | length 568.2
  Top Layer w10: U1.44 4701.71,4232.83 5037.81,3896.73 R5.2
DP: R6.2 U1.45 | length 513.5
  Top Layer w10: U1.45 4721.39,4243.15 4967.81,3996.73 5018.15,3996.73 R6.2
DRV_EN: U1.40 U3.22 U3.24 U3.26 | length 887.5
  Top Layer w10: U3.26 4095.41,4199.13 4097.81,4196.73 4145.78,4196.73 ; U3.24 4146.59,4197.55 4145.78,4196.73 ; U3.22 4197.81,4206.73 4187.81,4196.73 4145.78,4196.73 ; U3.22 4197.81,4296.73 v2(4212.81,4311.73) ; U1.40 4622.97,4361.89 v2(4652.81,4391.73)
  Bottom Layer w10: v2(4212.81,4311.73) 4222.81,4321.73 4222.81,4326.73 4257.81,4361.73 4477.81,4361.73 4507.81,4391.73 v2(4652.81,4391.73)
ENC_A: U1.41 U12.1 | length 856.2
  Top Layer w10: U1.41 4642.65,4181.89 4697.81,4126.73 4697.81,4061.73 5044.23,3715.32 U12.1
ENC_B: U1.42 U12.2 | length 872.5
  Top Layer w10: U1.42 4662.81,4314.89 4662.81,4201.73 4727.81,4136.73 4727.81,4071.73 5103.29,3696.26 U12.2
ENC_I: U1.43 U12.3 | length 888.8
  Top Layer w10: U1.43 4682.02,4222.52 4752.81,4151.73 4752.81,4091.73 5162.34,3682.21 U12.3
ENC_MISO: U1.35 U11.3 | length 769.7
  Top Layer w10: U1.35 4524.54,4215 4632.81,4106.73 4632.81,3791.73 4717.34,3707.21 U11.3
ENC_MOSI: U1.36 U11.4 | length 788.4
  Top Layer w10: U1.36 4541.45,4312.58 4541.45,4243.1 4662.81,4121.73 4662.81,3806.73 4776.4,3693.15 U11.4
ENC_NSS: U1.33 U11.1 | length 739.1
  Top Layer w10: U1.33 4482.81,4313 4482.81,4176.73 4547.81,4111.73 4547.81,3766.73 4599.23,3715.32 U11.1
ENC_SCK: U1.34 U11.2 | length 755.1
  Top Layer w10: U1.34 4502.81,4313.31 4502.81,4196.73 4597.81,4101.73 4597.81,3776.73 4658.29,3716.26 U11.2
EXTERN1: H4.1 U1.2 | length 998.6
  Top Layer w10: v1(4692.81,4651.73) 4760.76,4719.68 U1.2
  Bottom Layer w10: v1(4692.81,4651.73) 4882.81,4841.73 4882.81,4986.73 4967.81,5071.73 5167.81,5071.73 H4.1
EXTERN2: H4.2 U1.3 | length 908.6
  Top Layer w10: v1(4677.81,4676.73) 4682.81,4676.73 4687.81,4681.73 4697.81,4681.73 4741.08,4725 U1.3
  Bottom Layer w10: v1(4677.81,4676.73) 4857.81,4856.73 4857.81,5011.73 4952.81,5106.73 5132.81,5106.73 5152.81,5126.73 H4.2
EXTERN3: H4.3 U1.4 | length 782.1
  Top Layer w10: v1(4667.81,4701.73) 4692.81,4701.73 4721.39,4730.31 U1.4
  Bottom Layer w10: v1(4667.81,4701.73) 4832.81,4866.73 4832.81,5046.73 4942.81,5156.73 H4.3
GND: C1.1 C2.2 C3.2 C4.1 C5.1 C6.1 C7.1 C10.1 C17.1 C19.1 C20.1 C21.1 C22.1 C24.1 C25.2 C26.1 C29.1 CN2.2 D1.2 D4.1 D5.2 H1.4 H2.2 LED1.1 LED2.1 LED4.1 LED5.1 R1.2 R15.1 R17.2 R21.2 SW1.1 SW1.3 SW2.1 SW3.1 SW3.3 SW4.1 SW4.3 U1.18 U1.63 U3.6 U3.7 U3.10 U3.12 U3.13 U3.14 U3.20 U3.28 U3.29 U7.2 U8.2 U10.4 U10.6 USBC1.0 USBC1.1 USBC1.2 USBC1.3 USBC1.A1 USBC1.A12 USBC1.B1 USBC1.B12 X1.2 | length 12426.9
  Top Layer w10: v3(3327.81,4121.73) 3327.81,4073.97 3331.43,4070.35 ; v1(3967.81,4281.73) 3997.81,4311.73 C26.1 4027.81,4359.17 4027.81,4396.73 4067.81,4436.73 C3.2 ; 4032.81,4588.9 v1(4032.81,4676.73) ; U3.28 4044.23,4175.31 4095.73,4123.81 U3.29 ; LED1.1 4219.46,5081.87 LED5.1 4275.13,5096.73 4332.81,5096.73 H2.2 ; U3.6 4172.18,4085.26 U3.29 ; U3.7 4197.77,4040.32 4210.73,4053.28 U3.29@4210.73,4104.13 ; U3.20 4248.82,4161.9 U3.29 ; U3.10 4274.54,4040.32 U3.29@4210.73,4104.13 ; C4.1 4323.6,4669.68 U1.18 ; U3.12 4325.72,4068.82 4317.81,4076.73 4257.81,4076.73 U3.29 ; U3.13 U3.14 ; C10.1 4396.46,3997.82 U3.14 ; v3(4712.81,5046.73) 4714.29,5048.21 LED4.1 4937.8,5066.87 SW2.1 ; U1.63 4926.44,4669.68 R1.2 5023.49,4766.73 5047.81,4766.73 5092.93,4811.85 C1.1 5092.93,4911.73 SW2.1 ; USBC1.A1 5215.66,3744.59 USBC1.0 ; USBC1.B1 5215.66,4057.06 USBC1.1 ; 5264.53,3736.45 USBC1.3 ; 5264.53,4077.01 USBC1.2 ; SW4.3 5391.2,4988.35 5352.81,5026.73 5167.93,5026.73 SW2.1 ; U3.29@4210.73,4104.13 U3.29 ; U3.29 4325.73,4123.81 4376.9,4072.64 U3.14
  Top Layer w15: v1(3772.81,4411.73) 3772.81,4450.12 LED2.1 3771.34,4455.26 3802.81,4486.73 3930.65,4486.73 4032.81,4588.9 C7.1 C6.1 C5.1 C4.1 ; U8.2 3814.83,4264.17 C25.2 v1(3850.25,4151.73) ; 4337.81,3401.73 5107.81,3401.73 5380.22,3674.14 USBC1.3 ; C2.2 4957.81,4281.73 H1.4 ; USBC1.0 5264.53,3736.45 5302.81,3774.74 5302.81,4038.72 5264.53,4077.01 USBC1.1
  Top Layer w30: 3312.81,4851.73 3242.81,4851.73 3177.81,4786.73 3177.81,4636.73 3292.81,4521.73 v1(3424.59,4521.73) v1(3449.65,4521.73) v1(3477.57,4521.73) v1(3499.69,4499.62) 3499.69,4410.25 C19.1 3499.06,4320.25 C20.1 C21.1 C22.1 3456.8,4096.73 3357.81,4096.73 3331.43,4070.35 3317.81,4056.73 3317.81,3791.73 3477.81,3631.73 3807.81,3631.73
  Bottom Layer w10: v3(3327.81,4121.73) 3362.81,4156.73 3378.15,4156.73 R21.2 ; v1(3402.81,5096.73) 3457.81,5096.73 3452.81,5101.73 3452.81,5151.73 3462.81,5161.73 3477.81,5161.73 3485.37,5154.17 3485.37,5096.73 ; 3568.05,5096.73 3567.81,5096.97 3567.81,5156.73 3582.81,5171.73 3622.81,5171.73 ; 3595.61,5096.73 3597.81,5098.94 3597.81,5146.73 3622.81,5171.73 ; v3(3772.81,4641.73) 3760.96,4653.58 3760.96,5096.73 3760.96,5146.23 3735.46,5171.73 3622.81,5171.73 ; v1(3850.25,4151.73) 3967.81,4269.29 v1(3967.81,4281.73) ; v1(4032.81,4676.73) 4207.81,4851.73 4207.81,4921.73 4337.81,5051.73 4337.81,5086.73 4387.81,5136.73 H2.2 ; v3(4699.5,4976.18) 4699.5,5033.42 v3(4712.81,5046.73)
  Bottom Layer w15: v1(3772.81,4411.73) 3772.81,4229.17 v1(3850.25,4151.73) ; H1.4 5127.81,4251.73 5167.81,4251.73 5207.81,4211.73 ; USBC1.1 5207.81,4084.86 5207.81,4211.73 ; SW4.3 5356.2,4861.73 5340.45,4861.73 SW4.1 5391.2,4758.94 SW3.3 5330.18,4570.71 SW3.1 5386.2,4498.94 SW1.3 5325.18,4300.71 SW1.1 5296.79,4300.71 5207.81,4211.73
  other v1: 3842.81,3776.73 3872.81,3776.73 3842.81,3811.73 3872.81,3811.73 3762.81,3901.73 3789.48,3901.73 3762.81,3926.73 3788.97,3926.73 3762.81,3951.73 3788.47,3951.73 4147.81,4101.73 4172.81,4101.73 4197.81,4101.73 4222.81,4101.73 4247.81,4101.73 4272.81,4101.73 4147.81,4126.73 4172.81,4126.73 4197.81,4126.73 4222.81,4126.73 4247.81,4126.73 4272.81,4126.73 4147.81,4151.73 4172.81,4151.73 4197.81,4151.73 4222.81,4151.73 4247.81,4151.73 4272.81,4151.73 3527.81,4626.73 3552.81,4626.73 3572.81,4641.73 3527.81,4656.73 3552.81,4656.73
I_A: U1.14 U4.5 | length 1979.6
  Top Layer w10: U1.14 4524.54,4725 4537.81,4711.73 4547.81,4711.73 v1(4632.81,4626.73)
  Bottom Layer w10: U4.5 4167.81,3621.73 4247.81,3541.73 4652.81,3541.73 4767.81,3656.73 4767.81,4421.73 4647.81,4541.73 4647.81,4611.73 v1(4632.81,4626.73)
I_B: U1.15 U5.5 | length 1664.3
  Top Layer w10: U1.15 4503.81,4767.05 4503.81,4700.73 4512.81,4691.73 4537.81,4691.73 v1(4602.81,4626.73)
  Bottom Layer w10: U5.5 4384.73,3634.82 4437.81,3581.73 4617.81,3581.73 4727.81,3691.73 4727.81,4411.73 4612.81,4526.73 4612.81,4616.73 v1(4602.81,4626.73)
I_C: U1.16 U6.5 | length 1228.9
  Top Layer w10: U1.16 4487.81,4765.46 4487.81,4681.73 4497.81,4671.73 4527.81,4671.73 v1(4572.81,4626.73)
  Bottom Layer w10: v1(4572.81,4626.73) 4572.81,4526.73 4692.81,4406.73 4692.81,3745.54 4649.86,3702.58 U6.5
IMU_CS: H2.6 U1.20 | length 780.9
  Top Layer w10: U1.20 4499.23,4630.31 v3(4522.81,4606.73)
  Bottom Layer w10: v3(4522.81,4606.73) 4522.81,4626.73 4787.81,4891.73 H2.6
IMU_MISO: H2.5 U1.22 | length 758.7
  Top Layer w10: U1.22 4468.6,4590.94 v3(4482.81,4576.73)
  Bottom Layer w10: v3(4482.81,4576.73) 4462.81,4596.73 4462.81,4641.73 4667.81,4846.73 4667.81,5131.73 H2.5
IMU_MOSI: H2.4 U1.23 | length 769.4
  Top Layer w10: U1.23 4453.28,4571.26 v3(4477.81,4546.73)
  Bottom Layer w10: v3(4477.81,4546.73) 4437.81,4586.73 4437.81,4646.73 4592.81,4801.73 4592.81,5146.73 H2.4
IMU_SCK: H2.3 U1.21 | length 1148.7
  Top Layer w10: U1.21 4483.91,4610.63 v3(4517.81,4576.73)
  Bottom Layer w10: H2.3 4552.81,5216.73 4717.81,5216.73 4737.81,5196.73 4737.81,4876.73 4485.31,4624.23 4485.31,4609.23 v3(4517.81,4576.73)
IPS_MOSI: U1.53 | length 3572.6
  Top Layer w10: v1(4797.81,4471.73) 4798.91,4472.83 U1.53
  Bottom Layer w10: 3705.84,5096.73 3707.81,5094.76 3707.81,4259.36 3691.81,4243.36 3691.81,3767.73 3757.81,3701.73 3847.81,3701.73 4052.81,3496.73 4687.81,3496.73 4852.81,3661.73 4852.81,4416.73 v1(4797.81,4471.73)
IPS_NSS: U1.50 | length 3665.4
  Top Layer w10: U1.50 4915.76,4413.78 v1(4942.81,4386.73)
  Bottom Layer w10: 3650.73,5096.73 3650.73,4493.82 3647.81,4490.91 3647.81,3756.73 3742.81,3661.73 3832.81,3661.73 4037.81,3456.73 4702.81,3456.73 4902.81,3656.73 4902.81,4276.73 4967.81,4341.73 4967.81,4361.73 v1(4942.81,4386.73)
IPS_RES: U1.54 | length 3564.5
  Top Layer w10: v1(4767.81,4481.73) 4792.81,4506.73 4798.6,4506.73 4812.81,4492.52 U1.54
  Bottom Layer w10: 3733.4,5096.73 3737.81,5092.32 3737.81,4256.73 3712.81,4231.73 3712.81,3771.73 3762.81,3721.73 3852.81,3721.73 4057.81,3516.73 4672.81,3516.73 4827.81,3671.73 4827.81,4406.73 4767.81,4466.73 v1(4767.81,4481.73)
IPS_SCK: U1.51 | length 3614.1
  Top Layer w10: U1.51 4931.08,4433.46 v1(4937.81,4426.73)
  Bottom Layer w10: 3678.29,5096.73 3678.29,4267.2 3669.23,4258.15 3669.23,3765.32 3752.81,3681.73 3842.81,3681.73 4047.81,3476.73 4697.81,3476.73 4882.81,3661.73 4882.81,4371.73 v1(4937.81,4426.73)
KEY1: R8.1 SW1.2 U1.57 | length 527.4
  Top Layer w10: U1.57 4972.97,4551.57 5042.81,4481.73 5087.81,4481.73 5132.81,4436.73 R8.1 5137.81,4416.73 5303.4,4416.73 SW1.2
KEY2: R7.1 SW3.2 U1.58 | length 534.6
  Top Layer w10: U1.58 4859.65,4571.73 4992.81,4571.73 5027.81,4536.73 5072.47,4536.73 5107.47,4571.73 5110.01,4571.73 5196.04,4657.76 5279.43,4657.76 SW3.2
KEY3: R9.1 SW4.2 U1.59 | length 627.3
  Top Layer w10: U1.59 4982.02,4590.94 R9.1 5107.81,4746.73 5314.43,4953.35 SW4.2
LCD_BL_VCC: U1.55 | length 4176.3
  Top Layer w10: U1.55 4957.34,4512.2 v1(4972.81,4496.73)
  Bottom Layer w10: 3521.99,5087.67 3512.93,5096.73 3512.93,4916.61 3597.81,4831.73 3597.81,4041.73 3482.81,3926.73 3482.81,3756.73 3632.81,3606.73 3812.81,3606.73 4002.81,3416.73 4712.81,3416.73 4942.81,3646.73 4942.81,4236.73 5047.81,4341.73 5047.81,4421.73 v1(4972.81,4496.73)
LED1: R22.1 U1.24 | length 642.7
  Top Layer w10: v1(4342.81,4561.73) 4352.97,4551.57 U1.24 ; v1(4522.81,4996.73) R22.1@4522.81,5061.05
  Top Layer w15: R22.1@4522.81,5061.05 R22.1
  Bottom Layer w10: v1(4342.81,4561.73) 4342.81,4581.73 4472.81,4711.73 4472.81,4946.73 v1(4522.81,4996.73)
LED2: R23.1 U1.25 | length 679.8
  Top Layer w10: v1(4307.81,4546.73) 4322.65,4531.89 U1.25 ; R23.1 4437.81,5046.73 v1(4437.81,5001.73)
  Bottom Layer w10: v1(4307.81,4546.73) 4307.81,4576.73 4437.81,4706.73 v1(4437.81,5001.73)
OUT1_CS: R11.1 U3.5 U4.1 | length 209.3
  Top Layer w8: v2(4082.81,3836.73) 4092.81,3826.73 4114.07,3826.73 R11.1
  Bottom Layer w10: U4.1 4017.81,3851.73 4032.81,3836.73 v2(4082.81,3836.73)
OUT2_CS: R12.1 U3.8 U5.1 | length 166.3
  Top Layer w8: v2(4187.81,3841.73) 4202.81,3826.73 4214.07,3826.73 R12.1
  Bottom Layer w10: v2(4187.81,3841.73) 4234.73,3888.65 U5.1
OUT3_CS: R24.1 U3.9 U6.1 | length 183.8
  Top Layer w8: R24.1 4346.55,3826.73 4357.81,3826.73 v2(4372.81,3841.73)
  Bottom Layer w10: v2(4372.81,3841.73) 4378.66,3841.73 U6.1
OUT_A: R11.2 U4.8 U10.1 | length 204
  Top Layer w8: v2(4072.81,3786.73) 4082.81,3796.73 4112.81,3796.73 R11.2
  Bottom Layer w10: U4.8 4017.81,3761.73 4042.81,3786.73 v2(4072.81,3786.73)
OUT_B: R12.2 U5.8 U10.2 | length 166.4
  Top Layer w8: v2(4187.81,3786.73) 4192.81,3786.73 4202.81,3796.73 4212.81,3796.73 R12.2
  Bottom Layer w10: v2(4187.81,3786.73) 4234.73,3739.82 U5.8
OUT_C: R24.2 U6.8 U10.3 | length 207.3
  Top Layer w8: R24.2 4347.81,3796.73 4367.81,3796.73 v2(4382.81,3781.73)
  Bottom Layer w10: v2(4382.81,3781.73) 4385.32,3779.22 4420.32,3779.22 4457.81,3741.73 U6.8
PVDD: C12.1 C19.2 C20.2 C21.2 C22.2 C24.2 C29.2 D2.1 D4.2 R3.2 R16.2 U3.4 U3.11 U7.5 | length 1944.9
  Top Layer w10: C22.2 3713.66,4139.62 D4.2 ; 4037.81,3831.73 4057.81,3811.73 4382.81,3811.73 4417.81,3846.73 4417.81,3866.73 4342.81,3941.73 4317.81,3941.73 4300.13,3959.41 U3.11
  Bottom Layer w10: v1(3257.81,4791.73) 3342.81,4876.73 3342.81,5191.73 3387.47,5236.39 R3.2@3997.81,5236.39
PWM_A: U1.37 U3.27 | length 832.9
  Top Layer w10: U3.27 4067.81,4251.8 4067.81,4341.73 v2(4107.81,4381.73) ; U1.37 4563.91,4447.83 v2(4587.81,4471.73)
  Bottom Layer w10: v2(4107.81,4381.73) 4167.81,4441.73 4442.81,4441.73 4472.81,4471.73 v2(4587.81,4471.73)
PWM_B: U1.38 U3.25 | length 762.6
  Top Layer w10: U3.25 4121,4339.92 4132.81,4351.73 v2(4137.81,4351.73) ; U1.38 4583.6,4422.52 v2(4607.81,4446.73)
  Bottom Layer w10: v2(4137.81,4351.73) 4197.81,4411.73 4452.81,4411.73 4487.81,4446.73 v2(4607.81,4446.73)
PWM_C: U1.39 U3.23 | length 698.1
  Top Layer w10: U3.23 4172.81,4250.42 v2(4172.81,4331.73) ; U1.39 4603.28,4392.2 v2(4632.81,4421.73)
  Bottom Layer w10: v2(4172.81,4331.73) 4227.81,4386.73 4462.81,4386.73 4497.81,4421.73 v2(4632.81,4421.73)
RST: C1.2 R2.1 SW2.2 U1.7 | length 778.4
  Top Layer w10: U1.7 4662.34,4814.47 4647.81,4829 4647.81,5006.73 4662.81,5021.73 4822.69,5021.73 SW2.2 4937.81,4906.61 R2.1 C1.2
SWCLK: H1.2 U1.49 | length 515.9
  Top Layer w10: U1.49 4892.65,4394.09 4925.01,4361.73 5127.81,4361.73 5257.81,4231.73 H1.2
SWDIO: H1.1 U1.46 | length 761.5
  Top Layer w10: U1.46 4741.08,4258.46 4867.81,4131.73 5332.81,4131.73 5357.81,4156.73 H1.1
V3P3: C10.2 R10.2 U3.15 U3.16 U3.17 | length 329.3
  Top Layer w10: R10.2 4325.59,4338.61 U3.17 U3.16 U3.15 4437.81,4188.75 4437.81,4104.29 C10.2
VBAT: CN2.1 D2.2
VBUS_S: C9.2 R3.1 R4.2 U1.26 | length 1456.6
  Top Layer w10: v1(4272.81,4541.73) 4302.34,4512.2 U1.26
  Bottom Layer w10: R3.1@3997.81,5177.07 R4.2 4002.35,5101.85 4110.37,5101.85 4122.81,5114.29 4122.81,5156.73 4187.81,5221.73 4402.81,5221.73 4432.81,5191.73 4432.81,5106.73 4392.81,5066.73 4392.81,4696.73 4272.81,4576.73 v1(4272.81,4541.73)
"": C30.1 C30.2 CN2.3 CN2.4 U1.6 U1.8 U1.9 U1.10 U1.11 U1.17 U1.27 U1.28 U1.29 U1.30 U1.56 U1.61 U1.62 U3.19 U3.21 U10.5 U11.5 U11.6 U12.5 U12.6 USBC1.A4 USBC1.A5 USBC1.A8 USBC1.A9 USBC1.B4 USBC1.B5 USBC1.B8 USBC1.B9 X1.1

## Polygon pours and split planes (outlines as drawn)
PVDD on Top Layer (solid, remove dead copper, pour order 0): 3367.81,4026.73 3367.81,3921.73 3382.81,3906.73 3467.81,3906.73 3502.81,3941.73 3502.81,3991.73 3567.81,4056.73 3627.81,4056.73 3632.81,4061.73 3632.81,4551.73 3617.81,4566.73 3562.81,4566.73 3542.81,4546.73 3542.81,4111.73 3497.81,4066.73 3407.81,4066.73
PVDD on Top Layer (solid, remove dead copper, pour order 1): 3602.81,4581.73 3587.81,4581.73 3567.81,4601.73 3402.81,4601.73 3362.81,4641.73 3297.81,4641.73 3262.81,4676.73 3262.81,4751.73 3324.6,4751.73 3336.38,4763.51 3336.38,4798.16 3322.81,4811.73 3252.81,4811.73 3212.81,4771.73 3212.81,4651.73 3267.81,4596.73 3322.81,4596.73 3347.81,4571.73 3517.81,4571.73 3542.81,4546.73 3627.81,4546.73 3632.81,4551.73
PVDD on Top Layer (solid, remove dead copper, pour order 2): 3357.81,4641.73 3363.01,4641.73 3402.81,4681.53 3402.81,4681.73 3492.81,4681.73 3497.81,4671.73 3497.81,4596.73 3503.12,4595.33 3404.22,4595.33
GND on Top Layer (solid, remove dead copper, pour order 3): 3347.81,4811.73 3347.81,4756.73 3352.81,4751.73 3407.81,4751.73 3445.37,4789.29 3445.37,4934.17 3387.81,4991.73 3387.81,5076.73 3412.81,5091.73 3562.81,5091.73 3627.81,5066.73 3627.81,4991.73 3502.81,4871.73 3502.81,4811.73 3507.81,4806.73 3522.81,4806.73 3527.81,4811.73 3527.81,4861.73 3567.81,4901.73 3747.81,4901.73 3747.81,5121.73 3357.81,5121.73 3317.81,5106.73 3317.81,4841.73
$1N21931 on Top Layer (solid, remove dead copper, pour order 4): 3298.48,4741.73 3437.81,4741.73 3452.81,4756.73 3487.81,4756.73 3492.81,4751.73 3492.81,4706.73 3402.81,4706.73 3392.81,4686.73 3282.81,4686.73 3277.81,4691.73 3277.81,4721.06
$1N12380 on Top Layer (solid, remove dead copper, pour order 5): 3537.81,4766.73 3537.81,4711.73 3577.81,4671.73 3747.81,4671.73 3777.81,4701.73 3777.81,4821.73 3752.81,4846.73 3682.81,4846.73 3667.81,4831.73 3667.81,4810.91 3653.33,4796.43 3567.51,4796.43
GND on Top Layer (solid, remove dead copper, pour order 6): 3514.49,4616.73 3507.66,4623.56 3507.81,4623.72 3507.81,4671.73 3552.81,4671.73 3577.81,4656.73 3777.81,4656.73 3787.81,4666.73 3857.81,4666.73 3870.07,4654.48 3870.07,4578.62 3853.18,4561.73 3642.81,4561.73 3612.81,4591.73 3597.81,4591.73 3572.81,4616.73
+5V on Top Layer (solid, remove dead copper, pour order 7): 3810.37,4862.25 3937.29,4862.25 3962.81,4836.73 3962.81,4586.73 3888.45,4586.73 3881.41,4593.78 3881.41,4657.95 3847.63,4691.73 3827.81,4691.73 3827.81,4821.73 3867.81,4861.73 3810.89,4861.73
+5V on Top Layer (solid, remove dead copper, pour order 8): 3797.81,4851.73 3797.81,4987.37 3817.18,5006.73 3917.81,5006.73 3962.81,4961.73 3962.81,4825.32 3968.17,4819.97 3829.58,4819.97
GND on Top Layer (solid, remove dead copper, pour order 9): 3707.81,5116.73 3732.81,5141.73 3892.81,5141.73 3922.81,5111.73 3922.81,5071.73 3892.81,5041.73 3821.2,5041.73 3786.2,5006.73 3729.21,5006.73 3707.81,5028.13
VBAT on Top Layer (solid, remove dead copper, pour order 10): 3467.81,3716.73 3517.81,3666.73 3617.81,3666.73 3682.81,3731.73 3682.81,4041.73 3562.81,4041.73 3527.81,4006.73 3527.81,3977.61 3527.81,3880.95 3467.81,3820.95
AGND on Top Layer (solid, remove dead copper, pour order 11): 4263.66,4952.14 4263.66,4880.36 4272.29,4871.73 4457.81,4871.73 4482.81,4896.73 4540.1,4896.73 4553.12,4883.71 4553.12,4858.19 4580.37,4830.93 4615.23,4830.93 4630.06,4845.76 4630.06,4929.49 4592.81,4966.73 4277.81,4966.73 4262.81,4951.73 4263.25,4951.73
PVDD on Top Layer (solid, remove dead copper, pour order 12): 4042.81,3926.73 4042.81,3886.34 4029.34,3872.86 3981.68,3872.86 3927.81,3926.73 3927.81,4016.73 3757.81,4186.73 3607.81,4186.73 3607.81,4056.73 3697.81,4056.73 3752.82,4001.73 3808.79,4001.73 3847.81,3962.7 3847.81,3891.73 3917.81,3821.73 4036.04,3821.73 4085.94,3871.63 4085.94,3908.03 4067.24,3926.73
GND on Top Layer (solid, remove dead copper, pour order 14): 3723.6,3981.73 3807.81,3981.73 3827.81,3961.73 3827.81,3876.73 3897.81,3801.73 3897.81,3751.73 3732.81,3751.73 3707.81,3776.73 3707.81,3965.94
AGND on Bottom Layer (solid, remove dead copper, pour order 16): 4515.81,3981.73 4567.81,3981.73 4577.81,3991.73 4577.81,4181.73 4467.81,4291.73 4162.81,4291.73 4072.81,4381.73 4072.81,4406.73 4367.81,4701.73 4367.81,4965.6 4278.94,4965.6 4277.81,4966.73 4263.66,4952.58 4263.66,4726.61 4013.56,4476.51 4013.56,4351.15 4132.81,4236.73 4432.81,4236.73 4515.81,4138.74
GND on Bottom Layer (solid, remove dead copper, pour order 17): 4097.81,4191.12 4308.42,4191.12 4332.81,4166.73 4332.81,4091.73 4312.81,4071.73 4097.81,4071.73 4082.81,4086.73 4032.81,4086.73 3932.81,3986.73 3932.81,3786.73 3897.81,3751.73 3754.27,3751.73 3727.81,3778.19 3727.81,3781.73 3722.81,3786.73 3722.81,3966.73 3747.81,3991.73 3747.81,4076.73 3862.81,4191.73 4098.42,4191.73
GND on Top Layer (solid, remove dead copper, pour order 18): 4317.81,3671.73 4327.81,3681.73 4372.81,3681.73 4377.81,3676.73 4377.81,3421.73 4352.81,3396.73 4012.81,3396.73 3707.81,3701.73 3707.81,3866.73 3832.81,3866.73 4082.81,3616.73 4082.81,3561.73 4117.95,3526.59 4297.68,3526.59 4317.81,3546.73
GND on Bottom Layer (solid, remove dead copper, pour order 19): 3412.81,4566.73 3412.81,4481.73 3432.81,4461.73 3520.95,4461.73 3523.26,4464.05 3523.26,4527.18 3584.78,4588.7 3584.78,4666.28 3564.33,4686.73 3433.09,4686.73 3412.81,4666.45
PVDD on Top Layer (solid, remove dead copper, pour order 20): 4042.81,3921.73 4060.52,3939.44 4095.52,3939.44 4112.81,3956.73 4112.81,3989.63 4121,3997.82 4127.81,3991.01 4127.81,3930.88 4082.81,3886.73 4068.15,3911.51 4067.93,3911.73 4052.81,3911.73
OUT1_CS on Top Layer (solid, remove dead copper, pour order 21): 4111.63,3829.8 4163.99,3829.8 4163.99,3940.55 4152.81,3951.73 4152.81,3991.6 4146.59,3997.82 4137.81,3989.04 4137.81,3921.73 4132.81,3916.73 4129.31,3916.73 4109.55,3896.97 4109.55,3837.89 4112.72,3834.72 4112.72,3830.89
OUT2_CS on Top Layer (solid, remove dead copper, pour order 23): 4223.36,3976.18 4223.36,3973.07 4213.27,3962.97 4213.27,3949 4195.34,3931.07 4195.34,3849.21 4212.81,3831.73 4260.1,3831.73 4263.01,3828.82 4263.99,3829.8 4263.99,3916.35 4232.81,3947.53 4232.81,3966.73
OUT3_CS on Top Layer (solid, remove dead copper, pour order 25): 4248.95,3984.21 4248.95,3970.59 4268.43,3951.11 4284.73,3951.11 4313.25,3922.59 4334.73,3922.59 4334.73,3888.69 4349.98,3873.44 4329.86,3853.33 4293.88,3853.33 4293.88,3894.55 4240.64,3947.78 4240.64,3975.89
OUT_A on Top Layer (solid, remove dead copper, pour order 26): 4182.81,3761.73 4182.81,3581.73 4177.81,3576.73 4139.18,3576.73 4130.44,3585.47 4130.44,3637.84 4109.68,3658.6 4109.68,3753.6 4122.81,3761.73
OUT_B on Top Layer (solid, remove dead copper, pour order 27): 4237.81,3771.73 4269.25,3771.73 4273.92,3767.06 4273.92,3727.84 4243,3696.91 4243,3579.88 4237.81,3574.69 4199.85,3574.69 4192.81,3581.73 4192.81,3750.52 4208.42,3766.13 4235.16,3766.13 4237.81,3768.78
OUT_C on Top Layer (solid, remove dead copper, pour order 28): 4284.8,3771.73 4284.73,3771.8 4284.73,3724.19 4252.81,3692.28 4252.81,3581.73 4257.81,3576.73 4297.38,3576.73 4306.12,3585.47 4306.12,3675.68 4352.17,3721.73 4352.81,3721.73 4358.92,3727.84 4358.92,3767.06 4354.25,3771.73

## Silkscreen, mask and mechanical layers (free items; w line width, h text height)
Top Silkscreen Layer:
  lines w10 net "": 3247.81,4676.73 3372.81,4551.73 3927.81,4551.73 3962.81,4586.73 3962.81,4961.73 3802.81,5121.73 3302.81,5121.73 3247.81,5066.73 3247.81,4676.73 ; 3647.81,4231.73 3697.81,4181.73 3922.81,4181.73 4057.81,4316.73 4057.81,4451.73 4002.81,4506.73 3702.81,4506.73 3647.81,4451.73 3647.81,4231.73 ; 3982.81,4721.73 3982.81,4956.73 4042.81,5016.73 4297.81,5016.73 4367.81,4946.73 4367.81,4756.73 4302.81,4691.73 4012.81,4691.73 3982.81,4721.73
  text "3.3" at 4185.6,5220.61 h25.96
  text "GND" at 4345.6,5220.61 h25.96
  text "5V" at 3661.2,5031.73 h38.94
  text "3.3A" at 4162.78,4965.05 h38.94
  text "AGND" at 4368.62,4922.83 h32.45
  text "3.3" at 3884.49,4455.05 h38.94
  text "GND" at 5010.04,4257.83 h32.45
  text "5v" at 5126.47,4257.83 h32.45
  text "SWCLK" at 5248.93,4237.24 h25.96 r90
  text "SPI" at 4645.04,3697.83 h32.45
  text "w" at 4269.33,3687.46 h39.22
  text "u" at 4142.81,3684.91 h39.22
  text "v" at 4207.41,3684.91 h39.22
  text "a" at 5028.83,3684.9 h39.22
  text "b" at 5087.81,3684.91 h39.22
  text "i" at 5147.81,3684.91 h39.22
  text "-" at 3755.07,3550.08 h65.37
  text "+" at 3542.81,3548.7 h65.37
Mechanical 1:
  lines w10 net "": 3142.81,3481.73 ccw(c3267.81,3481.73) 3267.81,3356.73 5322.81,3356.73 ccw(c5322.81,3476.73) 5442.81,3476.73 5442.81,5141.73 ccw(c5317.81,5141.73) 5317.81,5266.73 3267.81,5266.73 ccw(c3267.81,5141.73) 3142.81,5141.73 3142.81,3481.73